# Altium PCB WatchDogAlarm_rev1_3.PcbDoc
Units mm, origin at the board's own origin, x right, y up, seen from the top; angles counter-clockwise.
Board outline 60 x 69.9 mm, 2 copper layers (Top Layer, Bottom Layer), stack 1.571 mm thick; 90 components, 62 nets, 311 pads, 95 vias.
Unrouted connection lines stored in the file: 24.
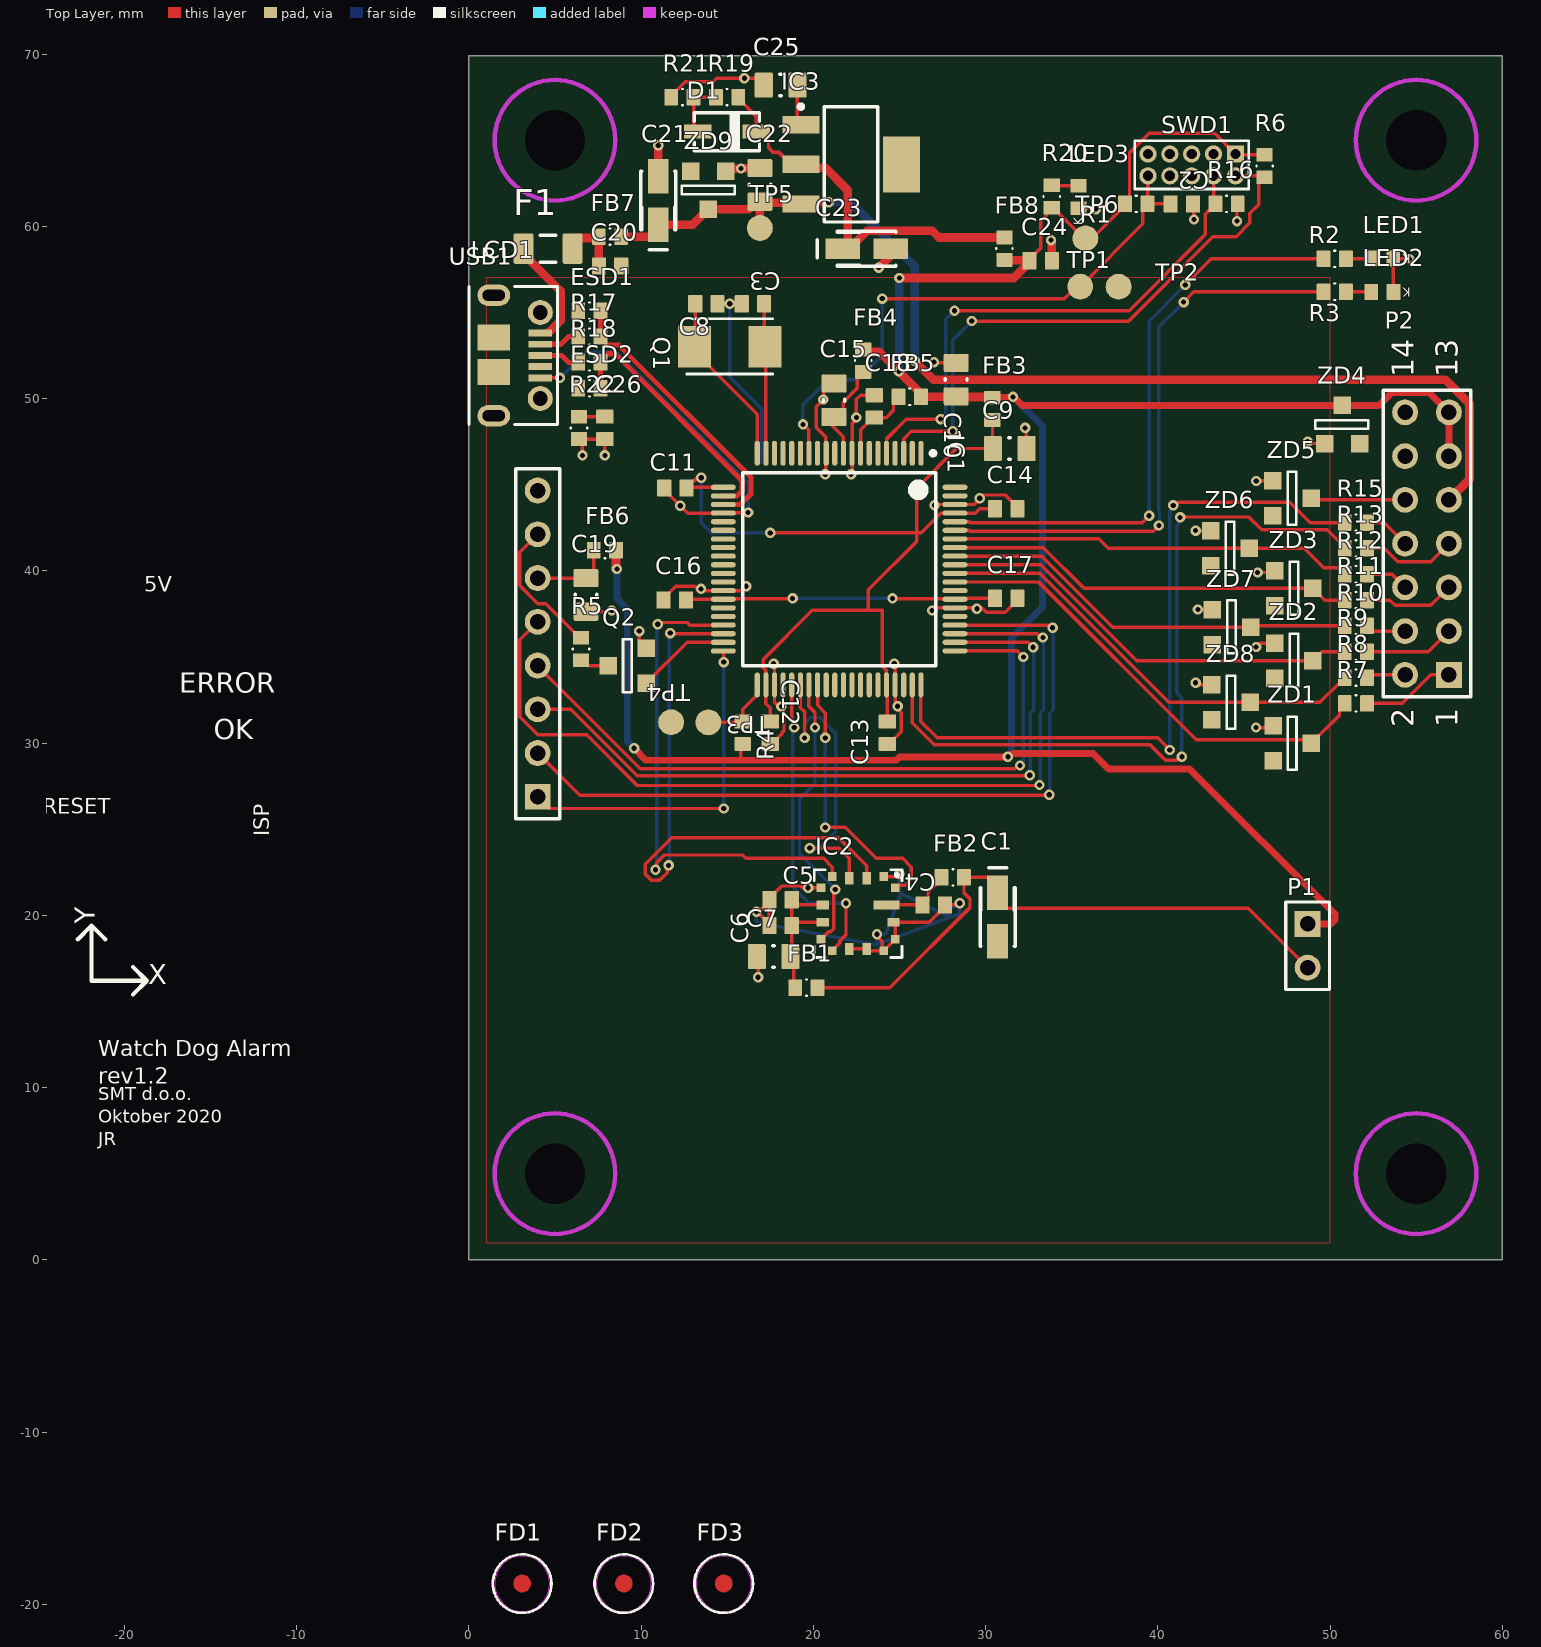
[diagram p0: Top Layer view]
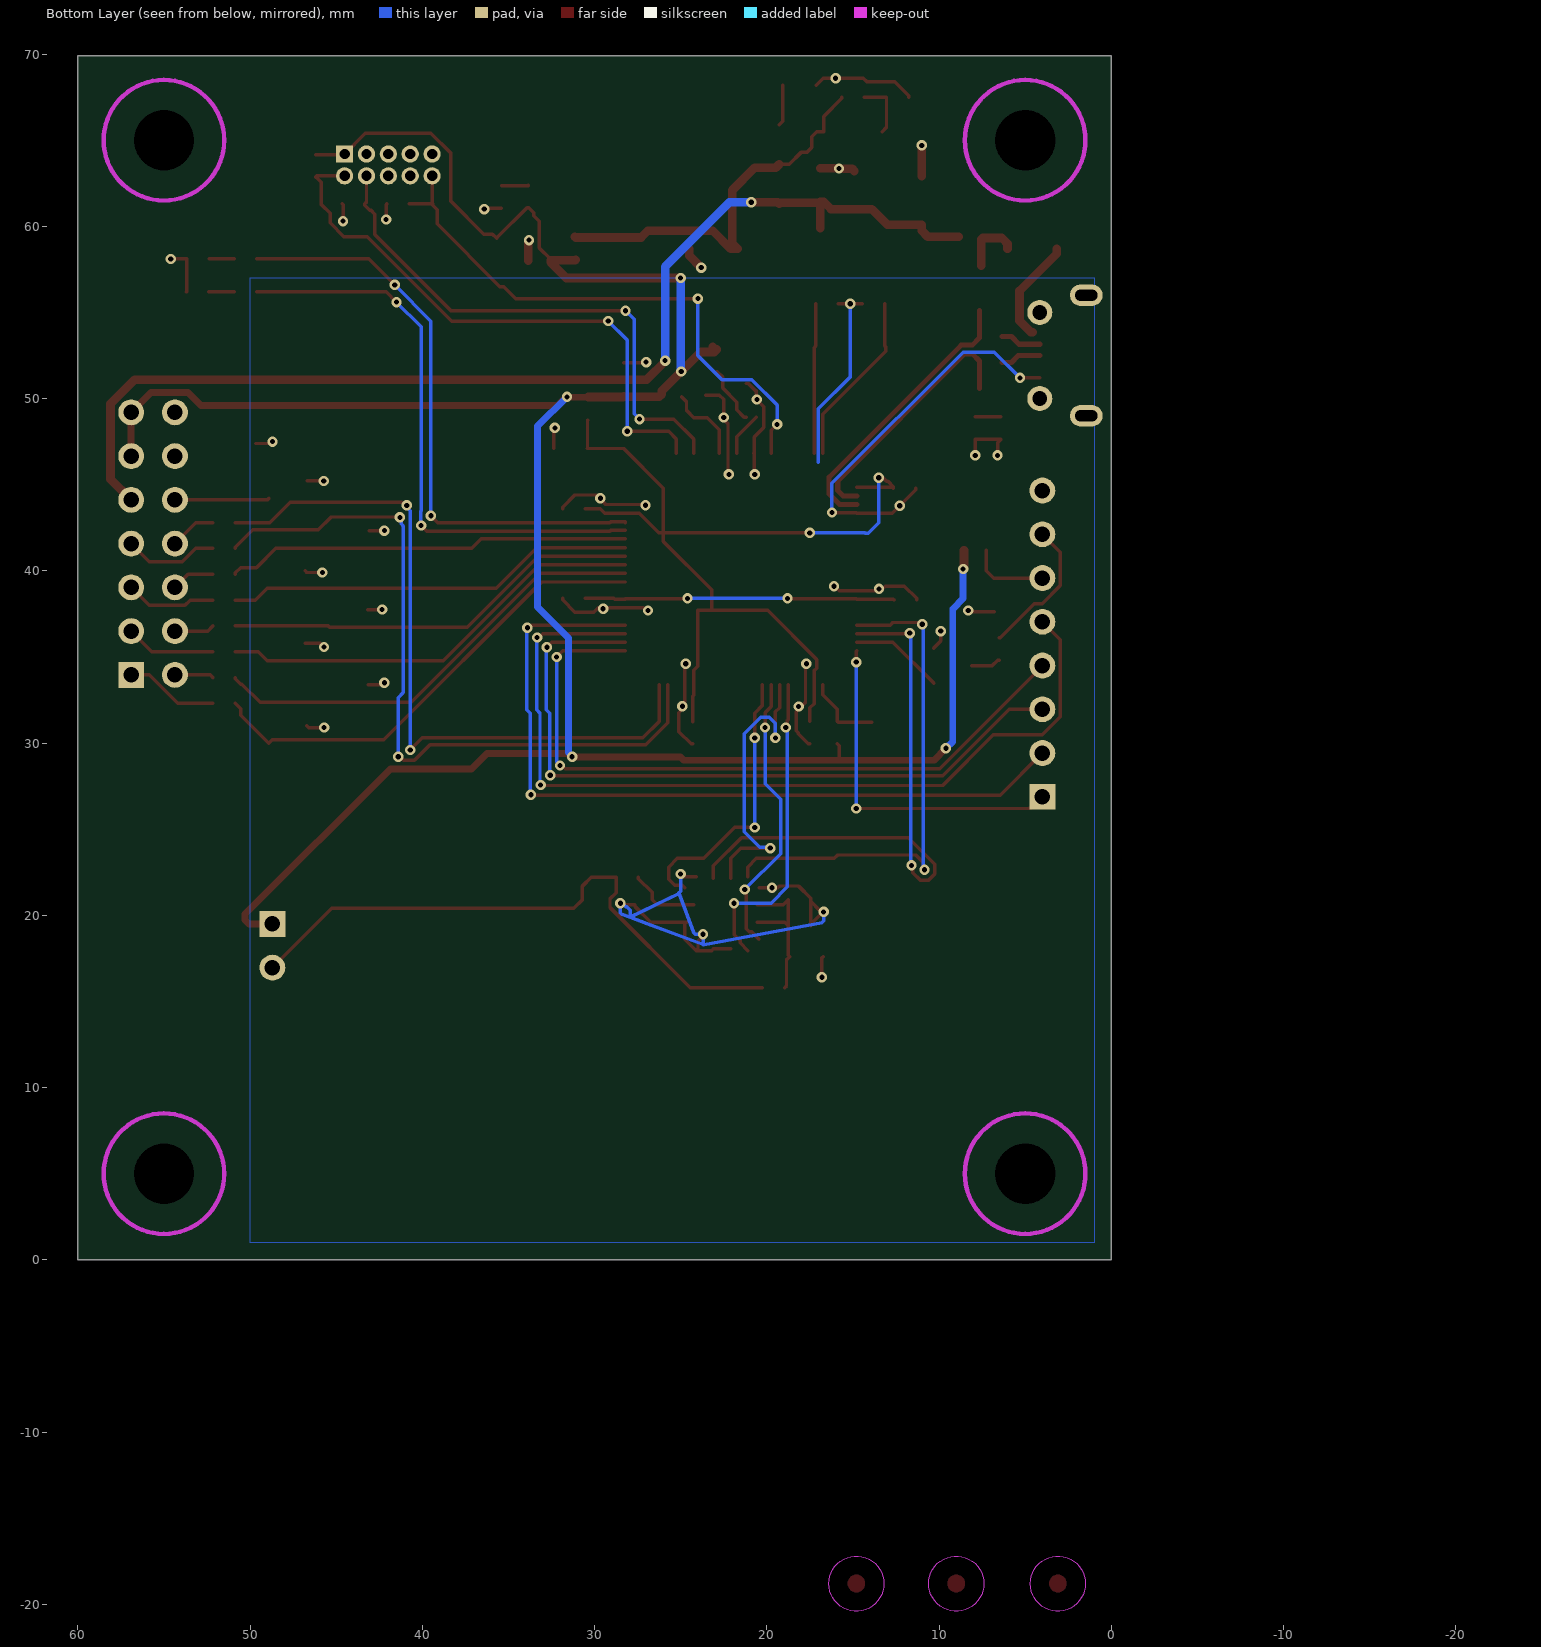
[diagram p1: Bottom Layer view, seen from below]
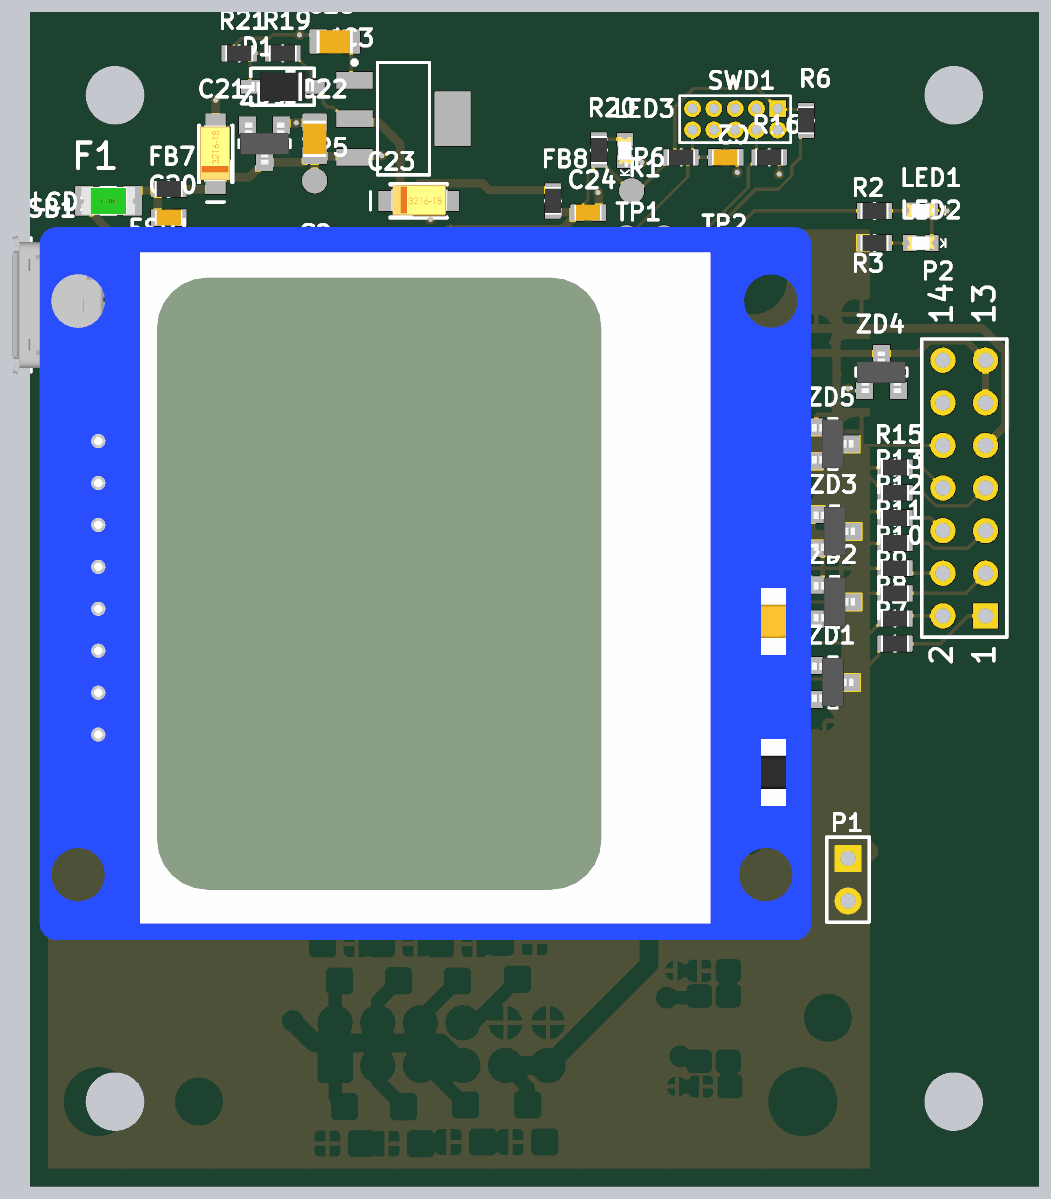
[diagram p2: 3D render of the assembled board from above, using the file's embedded part models]

## Layer stack, top to bottom
Top Solder: solder mask 0.0102, Solder Resist, Dk 3.5
Top Layer: signal copper 0.0356
Dielectric 1: dielectric 1.5, FR-4, Dk 4.8
Bottom Layer: signal copper 0.0356
Bottom Solder: solder mask 0.0102, Solder Resist, Dk 3.5

## Board outline
0,0 0,69.9 60,69.9 60,0

## Design rules (kind name [scope] priority, off if disabled: settings)
Clearance Clearance_USB [(InDifferentialPairClass('All Differential Pairs')) vs (not InDifferentialPairClass('All Differential Pairs'))] p1 off: gap=0.5 ignorepadtopadclearanceinfootprint=TRUE
Clearance Plolygon_Clearance [InPolygon] p2: gap=0.3 ignorepadtopadclearanceinfootprint=TRUE
Clearance [All] p3: gap=0.2 ignorepadtopadclearanceinfootprint=TRUE
DiffPairsRouting [All] p1: maxlimit=0.5 minlimit=0.2 mostfreqgap=0.2 toplayer_minwidth=0.3 toplayer_maxwidth=0.381 toplayer_prefwidth=0.3 bottomlayer_minwidth=0.3 bottomlayer_maxwidth=0.381 bottomlayer_prefwidth=0.3 maxuncoupledlength=12.7
HoleSize [All] p1: absolutevalues=TRUE maxlimit=5 minlimit=0.3 maxpercent=80.000 minpercent=20.000
MatchedLengths MatchedLengths_USB [All] p1: tolerance=1 checknetsindiffpair=TRUE checkdiffpairvsdiffpair=FALSE checkxsignals=FALSE checkothers=FALSE
MinimumSolderMaskSliver [All] p1: minsoldermaskwidth=0.2
PolygonConnect [All] p1: connectstyle=Relief reliefconductorwidth=0.254 reliefentries=4 polygonreliefangle="90 Angle" airgapwidth=0.254
RoutingVias [All] p1: holewidth=0.3 width=0.6 viastyle="Through Hole" minholewidth=0.3 minwidth=0.6 maxholewidth=0.8 maxwidth=1.3
SilkToSilkClearance [All] p1 off: silktosilkclearance=0.254
SolderMaskExpansion [All] p1: expansion=0.05 istentingtop=FALSE
Width [All] p1: maxlimit=5 minlimit=0.2 preferedwidth=0.2
26 further rules are at their usual default settings.

## Classes and differential pairs
component class Power: C20 C21 C22 C23 C24 C25 C26 D1 ESD1 ESD2 F1 FB7 FB8 IC3 LED3 R17 R18 R19 R20 R21 R22 TP5 TP6 USB1 ZD9
component class WatchDogAlarm_rev1_3: C1 C2 C3 C4 C5 C6 C7 C8 C9 C10 C11 C12 C13 C14 C15 C16 C17 C18 C19 FB1 FB2 FB3 FB4 FB5 FB6 FD1 FD2 FD3 IC1 IC2 LCD1 LED1 LED2 P1 P2 Q1 Q2 R1 R2 R3 R4 R5 R6 R7 R8 R9 R10 R11 R12 R13 R15 R16 SWD1 TP1 TP2 TP3 TP4 ZD1 ZD2 ZD3 ZD4 ZD5 ZD6 ZD7 ZD8
differential pair USB: +USB_P -USB_N
differential pair D: +D_P -D_N

## Components (designator, comment, footprint, x,y, rotation, side; value= is the part's Value field where it differs from the comment)
C1 "4u7" "Tantalum 3216" 30.7,19.9 r270 top
C2 "100n" SMD_C0603 41.4,61.3 r180 top
C3 "27p" SMD_C0603 16.5,55.5 r0 top
C4 "100n" SMD_C0603 27,20.6 r180 top
C5 "100n" SMD_C0603 18.1,20.9 r0 top
C6 "100n" SMD_C0603 18.1,19.4 r0 top
C7 "2u2" SMD_C0805 17.7,17.6 r0 top
C8 "27p" SMD_C0603 13.8,55.5 r180 top
C9 "2u2" SMD_C0805 31.4,47.1 r180 top
C10 "2u2" SMD_C0805 28.3,51.1 r270 top
C11 "100n" SMD_C0603 12,44.8 r0 top
C12 "100n" SMD_C0603 17.5,30.6 r90 top
C13 "100n" SMD_C0603 24.299,30.599 r90 top
C14 "100n" SMD_C0603 31.2,43.6 r180 top
C15 "2u2" SMD_C0805 21.2,49.9 r270 top
C16 "100n" SMD_C0603 11.954,38.306 r0 top
C17 "100n" SMD_C0603 31.2,38.4 r180 top
C18 "100n" SMD_C0603 23.547,49.545 r90 top
C19 "2u2" SMD_C0805 6.8,38.6 r90 top
C20 "10n" SMD_C0603 8.2,57.7 r180 top
C21 "4u7" "Tantalum 3216" 11,61.5 r90 top
C22 "2u2" SMD_C0805 16.9,62.4 r270 top
C23 "4u7" "Tantalum 3216" 23.1,58.7 r0 top
C24 "100n" SMD_C0603 33.2,58 r180 top
C25 "2u2" SMD_C0805 18.1,68.2 r0 top
C26 "10n" SMD_C0603 7.9,48.3 r90 top
D1 "BAT54T1G" SOD-123 15,65.5 r0 top
ESD1 "6V8" SMD_R0603 7,55.1 r0 top
ESD2 "6V8" SMD_R0603 7,50.6 r0 top
F1 "250mA" "PPTCF 1206" 4.6,58.7 r0 top
FB1 "600R@100MHz" SMD_R0603 19.6,15.8 r180 top
FB2 "600R@100MHz" SMD_R0603 28.1,22.2 r180 top
FB3 "600R@100MHz" SMD_R0603 30.4,49.4 r90 top
FB4 "600R@100MHz" SMD_R0603 22.9,52.2 r90 top
FB5 "600R@100MHz" SMD_R0603 25.6,50.1 r180 top
FB6 "600R@100MHz" SMD_R0603 7.9,41.2 r180 top
FB7 "600R@100MHz" SMD_R0603 8.2,59.4 r0 top
FB8 "600R@100MHz" SMD_R0603 31.1,58.7 r270 top
FD1 "Fiducial 1mm" FID1 3.1,-18.8 r0 top
FD2 "Fiducial 1mm" FID1 9,-18.8 r0 top
FD3 "Fiducial 1mm" FID1 14.8,-18.8 r0 top
IC1 "LPC1756FBD80,551" LQFP80 21.5,40.1 r270 top locked
IC2 "IIS2ICLXTR" LGA-16L 22.6,20.1 r180 top
IC3 "LM317AEMP/NOPB" SOT-223 22.2,63.6 r0 top
LCD1 "NOKIA_LCD" NOKIA_LCD 4,35.77 r90 top locked
LED1 "green" SMD_LD0603 53.025,58.128 r180 top
LED2 "red" SMD_LD0603 53.042,56.187 r180 top
LED3 "green" SMD_LD0603 35.4,61.7 r90 top
P1 "Header 2" HDR1X2 48.7,19.5 r270 top
P2 "Header 7X2" HDR2X7 56.9,33.96 r90 top
Q1 "12MHz" QABM3 17.2,53 r180 top
Q2 "2N7002" SOT-23 10.31,33.484 r90 top
R1 "10k" SMD_R0603 38.75,61.3 r180 top
R2 "240R" SMD_R0603 50.275,58.109 r180 top
R3 "240R" SMD_R0603 50.275,56.2 r180 top
R4 "10k" SMD_R0603 15.9,30.6 r270 top
R5 "240R" SMD_R0603 6.514,35.462 r270 top
R6 "10k" SMD_R0603 46.2,63.5 r90 top
R7 "33R" SMD_R0603 51.5,32.3 r180 top
R8 "33R" SMD_R0603 51.5,33.8 r0 top
R9 "33R" SMD_R0603 51.5,35.3 r180 top
R10 "33R" SMD_R0603 51.5,36.8 r0 top
R11 "33R" SMD_R0603 51.5,38.3 r180 top
R12 "33R" SMD_R0603 51.5,39.8 r0 top
R13 "33R" SMD_R0603 51.5,41.3 r180 top
R15 "33R" SMD_R0603 51.5,42.8 r0 top
R16 "10k" SMD_R0603 44,61.3 r180 top
R17 "33R" SMD_R0603 7,53.6 r180 top
R18 "33R" SMD_R0603 7,52.1 r180 top
R19 "240R" SMD_R0603 15,67.5 r0 top
R20 "1k" SMD_R0603 33.845,61.731 r270 top
R21 "402R" SMD_R0603 12.4,67.5 r0 top
R22 "33R" SMD_R0603 6.4,48.3 r90 top
SWD1 "Header 5x2" 2X5_SWD_CON 41.97,63.565 r180 top
TP1 "TEST_PAD_1.5mm" TEST_PAD_1.5MM 35.5,56.5 r90 top
TP2 "TEST_PAD_1.5mm" TEST_PAD_1.5MM 37.724,56.495 r90 top
TP3 "TEST_PAD_1.5mm" TEST_PAD_1.5MM 13.908,31.2 r270 top
TP4 "TEST_PAD_1.5mm" TEST_PAD_1.5MM 11.75,31.209 r270 top
TP5 "TEST_PAD_1.5mm" TEST_PAD_1.5mm 16.9,59.9 r180 top
TP6 "TEST_PAD_1.5mm" TEST_PAD_1.5mm 35.8,59.3 r90 top
USB1 "105017-0001.." USB_MICRO_B 2.8,52.5 r270 top
ZD1 "6V8" SOT-23 46.7,31 r270 top
ZD2 "6V8" SOT-23 46.8,35.8 r270 top
ZD3 "6V8" SOT-23 46.8,40 r270 top
ZD4 "6V8" SOT-23 49.684,47.39 r0 top
ZD5 "6V8" SOT-23 46.69,45.216 r270 top
ZD6 "6V8" SOT-23 43.09,42.316 r270 top
ZD7 "6V8" SOT-23 43.177,37.748 r270 top
ZD8 "6V8" SOT-23 43.146,33.377 r270 top
ZD9 "6V8" SOT-23 14.916,63.21 r180 top

## Footprints (in the part's own frame and the unit in brackets; to place one, negate y for a bottom-side part, rotate by r counter-clockwise, add the part's x,y. Pads: shape width x height; smd on the part's side, far side on the other; paste and mask are expansions set on the pad)
2X5_SWD_CON [mm]
  rect 1x1 hole 0.6: 1(-2.54,-0.635)
  round 1 hole 0.6: 2(-2.54,0.635) 3(-1.27,-0.635) 4(-1.27,0.635) 5(0,-0.635) 6(0,0.635) 7(1.27,-0.635) 8(1.27,0.635) 9(2.54,-0.635) 10(2.54,0.635)
  silkscreen extent -3.3,-1.4 3.3,1.4
FID1 [mm]
  Top Layer region: 0,-0.5 -0.099,-0.5 -0.283,-0.424 -0.424,-0.283 -0.5,-0.099 -0.5,0 -0.5,0.099 -0.424,0.283 -0.283,0.424 -0.099,0.5 0,0.5 0.099,0.5 0.283,0.424 0.424,0.283 0.5,0.099 0.5,0 0.5,-0.099 0.424,-0.283 0.283,-0.424 0.099,-0.5 0,-0.5
  Keep-Out Layer circle w0.01: c0,0 r1.6
  silkscreen extent -1.7,-1.7 1.7,1.7
HDR1X2 [mm] "Connector; Header; 2 Position"
  rect 1.5x1.5 hole 0.9: 1(0,0)
  round 1.5 hole 0.9: 2(2.54,0)
  silkscreen extent -1.27,-1.27 3.81,1.27
HDR2X7 [mm] "Connector; Header; 7x2 Position"
  rect 1.5x1.5 hole 0.9: 1(0,0)
  round 1.5 hole 0.9: 2(0,2.54) 3(2.54,0) 4(2.54,2.54) 5(5.08,0) 6(5.08,2.54) 7(7.62,0) 8(7.62,2.54) 9(10.16,0) 10(10.16,2.54) 11(12.7,0) 12(12.7,2.54) 13(15.24,0) 14(15.24,2.54)
  silkscreen extent -1.27,-1.27 16.51,3.81
LGA-16L [mm]
  rect 1.5x0.5 smd mask+0.05: 1(-1.65,-0.5)
  rect 0.5x0.5 smd mask+0.05: 2(-2.15,-1.5) 3(-1.5,-2.15) 6(1.5,-2.15) 7(2.15,-1.5) 10(2.15,1.5) 11(1.5,2.15) 14(-1.5,2.15) 15(-2.15,1.5)
  rect 0.5x0.7 smd mask+0.05: 4(-0.5,-2.05) 5(0.5,-2.05) 12(0.5,2.05) 13(-0.5,2.05)
  rect 0.7x0.5 smd mask+0.05: 8(2.05,-0.5) 9(2.05,0.5) 16(-2.05,0.5)
  silkscreen extent -2.55,-2.55 2.55,2.55, body extent -2.5,-2.5 2.5,2.5, height 1.7
LQFP80 [mm] "TSQFP, 80-Leads, Body 12,00x12,00mm, Pitch 0,50mm, IPC Medium Density"
  oval 1.45x0.3 smd: 1(-6.725,4.75) 2(-6.725,4.25) 3(-6.725,3.75) 4(-6.725,3.25) 5(-6.725,2.75) 6(-6.725,2.25) 7(-6.725,1.75) 8(-6.725,1.25) 9(-6.725,0.75) 10(-6.725,0.25) 11(-6.725,-0.25) 12(-6.725,-0.75) 13(-6.725,-1.25) 14(-6.725,-1.75) 15(-6.725,-2.25) 16(-6.725,-2.75) 17(-6.725,-3.25) 18(-6.725,-3.75) 19(-6.725,-4.25) 20(-6.725,-4.75) 41(6.725,-4.75) 42(6.725,-4.25) 43(6.725,-3.75) 44(6.725,-3.25) 45(6.725,-2.75) 46(6.725,-2.25) 47(6.725,-1.75) 48(6.725,-1.25) 49(6.725,-0.75) 50(6.725,-0.25) 51(6.725,0.25) 52(6.725,0.75) 53(6.725,1.25) 54(6.725,1.75) 55(6.725,2.25) 56(6.725,2.75) 57(6.725,3.25) 58(6.725,3.75) 59(6.725,4.25) 60(6.725,4.75)
  oval 0.3x1.45 smd: 21(-4.75,-6.725) 22(-4.25,-6.725) 23(-3.75,-6.725) 24(-3.25,-6.725) 25(-2.75,-6.725) 26(-2.25,-6.725) 27(-1.75,-6.725) 28(-1.25,-6.725) 29(-0.75,-6.725) 30(-0.25,-6.725) 31(0.25,-6.725) 32(0.75,-6.725) 33(1.25,-6.725) 34(1.75,-6.725) 35(2.25,-6.725) 36(2.75,-6.725) 37(3.25,-6.725) 38(3.75,-6.725) 39(4.25,-6.725) 40(4.75,-6.725) 61(4.75,6.725) 62(4.25,6.725) 63(3.75,6.725) 64(3.25,6.725) 65(2.75,6.725) 66(2.25,6.725) 67(1.75,6.725) 68(1.25,6.725) 69(0.75,6.725) 70(0.25,6.725) 71(-0.25,6.725) 72(-0.75,6.725) 73(-1.25,6.725) 74(-1.75,6.725) 75(-2.25,6.725) 76(-2.75,6.725) 77(-3.25,6.725) 78(-3.75,6.725) 79(-4.25,6.725) 80(-4.75,6.725)
  silkscreen extent -6.85,-5.6 5.6,5.6, body extent -6.9,-6.9 6.9,6.9, height 1.6
NOKIA_LCD [mm] "Connector; Header; 8 Position"
  rect 1.5x1.5 hole 0.9: 1(-8.89,0)
  round 1.5 hole 0.9: 2(-6.35,0) 3(-3.81,0) 4(-1.27,0) 5(1.27,0) 6(3.81,0) 7(6.35,0) 8(8.89,0)
  silkscreen extent -10.16,-1.27 10.16,1.27, body extent -21.14,-42.5 21.36,3.5, height 9.5
"PPTCF 1206" [mm] "PPTC fuse 2-Leads, Body 3.15x1.60mm, IPC Medium Density"
  rrect15% 1.15x1.75 smd: 1(-1.425,0) 2(1.425,0)
  silkscreen extent -0.45,-0.77 0.45,0.77, body extent -1.6,-0.82 1.6,0.83, height 0.59
QABM3 [mm]
  rect 1.9x2.4 smd: 1(0,0) 2(4.1,0)
  silkscreen extent -0.44,-1.63 4.56,1.57
SMD_C0603 [mm]
  rrect10% 0.82x1 smd: 1(-0.65,0) 2(0.65,0)
  body extent -0.82,-0.48 0.82,0.48, height 0.95
SMD_C0805 [mm] "Chip Capacitor, 2-Leads, Body 2.05x1.25mm, IPC Medium Density"
  rrect15% 1.05x1.45 smd: 1(-0.975,0) 2(0.975,0)
  silkscreen extent -0.05,-0.63 0.05,0.63, body extent -1.1,-0.7 1.1,0.7, height 1.4
SMD_LD0603 [mm]
  rrect10% 0.8x0.95 smd: 1(-0.65,0) 2(0.65,0)
  body extent -0.8,-0.4 0.8,0.4, height 0.7
SMD_R0603 [mm]
  rrect10% 0.8x0.95 smd: 1(-0.65,0) 2(0.65,0)
  silkscreen extent -0.03,-0.48 0.03,0.48, body extent -0.82,-0.48 0.82,0.48, height 0.5
SOD-123 [mm] "SOD-123; 2 Leads; Body 2.7 x 1.6 mm, (LxW)"
  rect 1.6x0.8 smd: 1(1.7,0) 2(-1.7,0)
  silkscreen extent -1.91,-1.1 1.88,1.1, body extent -1.88,-0.85 1.87,0.85, height 1.2
SOT-23 [mil]
  rect 40x40 smd: 1(0,0) 2(80,0) 3(40,87)
  silkscreen extent -21,34 100,53, body extent -18,-6 97,92, height 39
SOT-223 [mm] "SOT223, 4-Leads, Body 6.5x3.5mm, Pitch 2.3mm, Lead Span 7mm, IPC Medium Density"
  rect 2.15x1 smd: 1(-2.925,2.3) 2(-2.925,0) 3(-2.925,-2.3)
  rect 2.15x3.25 smd: 4(2.925,0)
  silkscreen extent -3.05,-3.35 1.55,3.47, body extent -3.5,-3.35 3.5,3.35, height 1.8
"Tantalum 3216" [mm]
  rect 2x1.2 smd: 1(-1.4,0) 2(1.4,0)
  silkscreen extent -2.87,-1.02 1.7,1.02, body extent -1.66,-0.86 1.74,0.94, height 1.8
TEST_PAD_1.5MM [mm]
  round 1.5 smd: 1(0,0)
TEST_PAD_1.5mm [mm]
  round 1.5 smd: 1(0,0)
USB_MICRO_B [mm] "part num: 105017-0001.."
  rect 1.5x1.9 smd: 0(-1.05,-1.35) 0(0.95,-1.35)
  rect 0.4x1.35 smd: 1(-1.3,1.35) 2(-0.65,1.35) 3(0,1.35) 4(0.65,1.35) 5(1.3,1.35)
  oval 1.25x1.9 hole 0.65 slot 1.3 at 90 deg: 6(-3.5,-1.35) 7(3.5,-1.35)
  round 1.45 hole 0.85: 8(2.5,1.35) 9(-2.5,1.35)
  silkscreen extent -4,-2.8 4,2.35, body extent -4.1,-3.9 4.1,1.5, height 2.78

## Part data
C1 C21 C23: library part "Capacitor - polarized", "Generic polarized capacitor"
C2 C3 C4 C5 C6 C7 C8 C9 C10 C11 C12 C13 C14 C15 C16 C17 C18 C19 C20 C22 C24 C25 C26: library part CAP, "Capacitor", properties=capacitor
D1: library part DIODE_SCHOTTKY, Manufacturer="ON SEMICONDUCTOR", farnellCode=1651157, partnumber=BAT54T1G, properties="Small Signal Schottky Diode, Single, 30 V, 200 mA, 350 mV, 600 mA, 150 °C"
ESD1 ESD2: library part ZenerDiode, "ESD Protection device", Manufacturer="ON Semiconductor", partnumber=BZX84C6V8LT1G, farnellCode=1651587, properties="Zener Single Diode, 6.8 V, 225 mW, SOT-23, 6 %, 3 Pins, 150 °C"
F1: library part PolyFuse, "Resettable Fuse, PPTC, 1206 (3216 Metric), POLYFUSE 1206L Series, 16 VDC, 250 mA, 500 mA, 0.08 s", Manufacturer=Littelfuse, Manufacturer Number=2920L030DR, Max voltage=16V, Resistance=2.3Ω, Trip current=500mA, Category=Fuses, Dealer=Farnell, Dealer number=1596990, HelpURL=https://www.farnell.com/datasheets/683946.pdf, Holing current=250mA, Price=0.46, Technology=SMT, Type="Poly fuse"
FB1 FB2 FB3 FB4 FB5 FB6 FB7 FB8: library part FB, "Ferrite bead"
FD1 FD2 FD3: library part FIDUCIAL, Category=Fiducials
IC1: library part LPC1756FBD80, "LPC1756FBD80", Manufacturer=NXP, partnumber=LPC1756FBD80,551, properties="Scalable Mainstream 32-bit Microcontroller (MCU) based on ARM Cortex-M3 Core"
IC2: Manufacturer=STM, partnumber=IIS2ICLXTR, properties="Inclinometers High-accuracy, high-resolution, low-power, 2-axis digital inclinometer with embedded Machine Learning Core"
IC3: library part LM317KC, "3-Terminal Adjustable Regulator", Manufacturer="TEXAS INSTRUMENTS", farnellCode=3122676, partnumber=LM317AEMP/NOPB, properties="Linear Voltage Regulator, Adjustable Positive, 40V primary input, 1.2V to 37V/1A/1 Output, SOT-223-4"
LED1 LED2 LED3: library part LED
P1: "Header, 2-Pin", LatestRevisionDate=17-Jul-2002, LatestRevisionNote="Re-released for DXP Platform.", Publisher="Altium Limited"
P2: "Header, 7-Pin, Dual row", LatestRevisionDate=17-Jul-2002, LatestRevisionNote="Re-released for DXP Platform.", Publisher="Altium Limited"
Q1: library part Crystal, "Crystal", Manufacturer=ABRACON, partnumber=ABM3-12.000MHZ-D2Y-T, properties="Crystal, 12 MHz, SMD, 5mm x 3.2mm, 30 ppm, 18 pF, 20 ppm, ABM3 Series"
Q2: library part N-MOSFET, "Power MOSFET, N Channel, 60 V, 300 mA, 2.8 ohm, SOT-23, Surface Mount", Case=SOT23-3, Manufacturer=NXP, Max current=0.3A, Max power disipation=830mW, Max voltage=60V, Category=MOSFETs, Dealer=Farnell, Dealer number=1510761, HelpURL=https://www.farnell.com/datasheets/1499179.pdf, Logic level=Yes, Manufacturer Number=2N7002, Price=0.039, RDS=2.8Ω, SKU=5000000000001, Technology=SMT, Type="N-enhancment mode"
R1 R2 R3 R4 R5 R6 R7 R8 R9 R10 R11 R12 R13 R15 R16 R17 R18 R19 R20 R21 R22: library part RESISTOR, properties=resistor
SWD1: library part "Header 5X2", "Header, 5-Pin, Dual row", Manufacturer=HARWIN, partnumber=M50-3500542, farnellCode=1022305, properties="Board-To-Board Connector, 1.27 mm, 10 Contacts, Header, Archer M50 Series, Through Hole, 2 Rows"
TP1 TP2 TP3 TP4 TP5 TP6: library part TEST_PAD
USB1: library part Micro_USB_MIUSB-F5M-BB-U, Manufacturer=MOLEX, farnellCode=2293836, partnumber=105017-0001.., properties="USB Connector, Micro USB Type B, USB 2.0, Receptacle, 5 Ways, Surface Mount, Right Angle"
ZD1 ZD2 ZD3 ZD4 ZD5 ZD6 ZD7 ZD8 ZD9: library part ZenerDiode, "Zener Diode", Manufacturer="ON Semiconductor", partnumber=BZX84C6V8LT1G, farnellCode=1651587, properties="Zener Single Diode, 6.8 V, 225 mW, SOT-23, 6 %, 3 Pins, 150 °C"

## Free pads (board coordinates)
  rect 0x0 hole 3.5 unplated mask+0.05: 0(5,5) 0(5,65) 0(55,5) 0(55,65)

## Via types
v1: diameter 0.6, hole 0.3, Top Layer to Bottom Layer, tented both sides, 95 vias

## Nets (pads, with @x,y where several pads share a name; then routed paths per layer and width w, separated by ;. In a path a pad name is that pad's centre, name@x,y a point inside that pad or via, vN(x,y) a via of type N, cw(c..) or ccw(c..) an arc to the next point about the centre after c; other vN are vias at no path point)
3V3: C10.2 C24.2 FB3.2 FB4.2 FB5.1 FB6.1 FB8.2 P1.1 P2.11 P2.13 R1.2 R4.2 R6.2 R20.2 SWD1.1 TP6.1 ZD4.3 | length 157.8
  Top Layer w0.2: 15.8,29 15.8,29.85 R4.2 ; C24.2 32.55,58.09 33.2,58.74 33.2,60.3 33.525,60.625 33.525,60.781 33.825,61.081 33.92,61.081 35.675,59.326 35.675,59.3 35.924,59.549 36.424,59.549 38.36,61.485 38.36,64.261 39.499,65.4 43.31,65.4 SWD1.1 44.56,64.15 R6.2
  Top Layer w0.4: v1(9.6,29.7) 10.3,29 15.8,29 24.802,29 25.002,29.2 31.354,29.2 31.554,29.4 36.252,29.4 37.152,28.5 41.85,28.5 50.284,20.066 50.284,19.734 50.05,19.5 P1.1 ; FB3.2@30.363,50.087 30.375,50.075 31.575,50.075 v1(31.6,50.1) 31.654,50.1 32.154,49.6 ZD4.3 52.855,49.6 53.605,50.35 55.75,50.35 P2.13 P2.11
  Top Layer w0.5: FB6.1 8.55,40.177 8.6,40.127 v1(8.6,40.1) ; FB4.2@23.125,53 22.975,52.85 FB4.2 23.05,52.7 23.838,52.7 v1(24.969,51.569) 26.1,50.438 26.1,50.25 FB5.1 26.263,50.112 28.287,50.112 C10.2 28.337,50.087 FB3.2@30.363,50.087 ; v1(25,57) 31.64,57 32.55,57.91 C24.2 32.525,58.025 31.125,58.025 FB8.2
  Bottom Layer w0.4: v1(8.6,40.1) 8.6,38.39 9.2,37.79 9.2,30.1 v1(9.6,29.7) ; v1(31.3,29.2) 31.3,29.254 31.5,29.454 31.5,36.1 33.3,37.9 33.3,48.4 v1(31.6,50.1)
  Bottom Layer w0.5: v1(24.969,51.569) 24.984,51.584 24.984,56.984 v1(25,57)
3V3_ACCEL: C1.1 FB1.1 FB2.1 P1.2 | length 35.3
  Top Layer w0.2: FB1.1 24.449,15.8 29.1,20.451 29.1,20.963 28.75,21.313 FB2.1 30.2,22.2 30.7,21.7 30.7,20.9 31.2,20.4 45.26,20.4 P1.2
5V_USB: C21.1 C22.2 FB7.2 IC3.3 P2.9 TP5.1 ZD9.3 | length 66
  Top Layer w0.5: FB7.2 10.65,59.4 11,59.75 C21.1 13,60.1 ZD9.3 16.275,61 16.7,61.425 C22.2 ; TP5.1 C22.2 ; v1(20.9,61.4) 19.375,61.4 IC3.3 19.212,61.362 16.962,61.362 C22.2 ; v1@25.881,52.181 26.962,51.1 56.697,51.1 58.1,49.697 58.1,45.32 P2.9
  Bottom Layer w0.5: v1(20.9,61.4) 22.161,61.4 25.9,57.661 v1(25.9,52.2)
AOUT: IC1.6 P2.10 ZD5.3 | length 5.5
  Top Layer w0.2: ZD5.3 48.98,44.12 P2.10
D_N: R17.2 USB1.2 | length 2.4
  Top Layer w0.3: USB1.2 5.35,53.15 5.8,53.6 R17.2
D_P: R18.2 USB1.3 | length 2.4
  Top Layer w0.3: USB1.3 5.4,52.5 5.8,52.1 R18.2
GND: C1.2 C2.1 C3.1 C4.1 C5.1 C6.1 C7.1 C8.1 C9.1 C10.1 C11.1 C12.1 C13.1 C14.1 C15.1 C16.1 C17.1 C18.2 C19.1 C20.1 C21.2 C22.1 C23.2 C24.1 C25.1 C26.1 IC1.9 IC1.12 IC1.24 IC1.33 IC1.43 IC1.57 IC1.66 IC1.78 IC2.3 IC2.7 IC2.12 IC2.13 IC2.14 IC2.15 IC2.16 LCD1.8 LED1.1 LED2.1 LED3.1 P2.12 P2.14 Q2.2 R16.1 R21.1 R22.1 SWD1.3 SWD1.5 SWD1.9 TP2.1 TP4.1 USB1.5 ZD1.1 ZD2.1 ZD3.1 ZD4.1 ZD5.1 ZD6.1 ZD7.1 ZD8.1 ZD9.1 | length 150
  Top Layer w0.2: USB1.5 v1(5.3,51.2) ; v1(6.6,46.7) 6.6,47.45 R22.1 C26.1 v1(7.9,46.7) ; C19.1 8.225,37.625 v1(8.3,37.7) ; v1(9.9,36.5) 9.902,36.498 9.902,35.924 Q2.2 ; C16.1 11.304,38.396 12.014,39.106 13.115,39.106 13.371,38.85 v1@13.69,38.85 ; C11.1 11.35,44.71 v1(12.28,43.78) 12.71,43.35 IC1.24 14.792,43.367 16.2,43.367 v1(16.216,43.383) ; R21.1 11.75,67.575 12.567,68.392 14.183,68.392 14.391,68.6 16.725,68.6 C25.1 ; v1(13.482,38.95) 13.59,38.95 v1@13.69,38.85 ; C8.1 v1(15.15,55.5) C3.1 ; v1(16.1,39.1) 16.048,39.1 15.798,38.85 v1@13.69,38.85 ; C7.1 16.8,17.525 v1(16.8,16.4) ; C6.1 C6.1@17.45,19.49 ; C12.1 17.59,29.95 18.183,30.543 18.183,30.597 18.3,30.714 18.3,31.807 v1@18.025,32.082 ; v1(17.7,34.6) 17.75,34.55 IC1.43 17.75,32.357 v1@18.025,32.082 ; v1(18.149,32.125) 18.106,32.082 v1@18.025,32.082 ; v1@19.8,21.6 v1(19.7,21.6) ; IC2.7 v1(19.7,21.6) ; v1(20.7,45.6) 20.731,45.631 20.731,46.806 IC1.12 20.731,46.844 20.731,47.766 20.175,48.322 20.175,49.528 20.573,49.927 v1(20.573,49.95) 20.614,49.99 20.614,50.45 20.654,50.45 21.079,50.875 C15.1 ; IC2.12 IC2.13 23.2,17.95 IC2.14 ; v1(22.2,45.6) 22.25,45.65 22.25,48.542 22.5,48.792 22.5,49.949 22.747,50.195 C18.2 ; v1(23.7,18.9) 23.7,18.792 23.992,18.5 23.992,18.058 IC2.14 ; IC2.3 24.85,22.25 v1(25,22.4) ; C13.1 24.389,29.949 25.099,30.659 25.099,31.759 v1@24.75,32.108 ; v1(24.7,34.6) 24.7,34.5 24.75,34.45 IC1.57 v1@24.75,32.108 ; v1(24.899,32.14) 24.867,32.108 v1@24.75,32.108 ; v1(26.9,37.7) 27.008,37.7 27.158,37.85 v1@29.55,37.85 ; v1(27.006,52.117) 27.048,52.075 C10.1 ; v1(27.037,43.81) 27.077,43.85 IC1.78 29.343,43.85 v1@29.663,44.17 ; v1(28.5,20.7) 28.4,20.6 C4.1 27.65,20.51 26.74,19.6 IC2.16 24.75,19.5 IC2.15 IC2.14 ; v1(29.5,37.8) v1@29.55,37.85 ; v1(29.663,44.214) v1@29.663,44.17 ; C17.1 31.85,38.31 31.14,37.6 30.04,37.6 29.79,37.85 v1@29.55,37.85 ; C14.1 31.85,43.69 31.14,44.4 29.893,44.4 v1@29.663,44.17 ; v1(32.3,48.3) 32.375,48.225 C9.1 ; LED3.1 36.35,61.05 v1(36.4,61) ; C2.1 42.1,61.25 v1(42.1,60.4) ; v1(42.2,33.5) 42.323,33.377 ZD8.1 ; v1(42.199,42.333) 42.216,42.316 ZD6.1 ; v1(42.331,37.749) 42.333,37.748 ZD7.1 ; v1(44.6,60.3) 44.6,61.25 R16.1 ; v1(45.7,30.9) 46.6,30.9 ZD1.1 ; v1@45.7,45.2 v1(45.716,45.216) ZD5.1 ; v1(45.71,35.575) 45.935,35.8 ZD2.1 ; v1(45.8,39.9) 46.7,39.9 ZD3.1 ; v1(48.7,47.5) 48.81,47.39 ZD4.1 ; LED2.1 53.683,56.196 53.683,58.12 LED1.1 54.572,58.128 v1(54.6,58.1) ; v1(16.7,20.2) 16.777,20.277 16.917,20.277 C5.1@17.45,20.81 ; v1(16.7,20.2) 16.74,20.2 v1@16.79,20.15 ; v1(16.7,20.2) 16.75,20.15 v1@16.79,20.15 ; v1@16.79,20.15 C6.1@17.45,19.49 ; C6.1@17.45,19.49 C5.1@17.45,20.81 ; C5.1@17.45,20.81 C5.1 17.45,20.99 18.16,21.7 19.26,21.7 19.36,21.6 v1(19.7,21.6)
  Top Layer w0.5: C21.2 v1(11,64.7) ; ZD9.1 15.043,63.337 15.787,63.337 15.816,63.366 16.891,63.366 C22.1 ; v1(23.8,57.6) 24.5,58.3 C23.2 ; v1(33.8,59.2) 33.85,59.15 C24.1
  Bottom Layer w0.2: v1(5.3,51.2) 6.8,52.7 8.6,52.7 16.216,45.084 v1(16.216,43.383) ; v1(15.15,55.5) 15.15,51.25 17,49.4 17,46.3 ; v1(16.7,20.2) 16.7,19.674 16.759,19.616 16.802,19.572 23.651,18.3 ; v1(25,22.4) 25,21.396 25.086,21.31 ; 25.09,21.269 27.934,19.888 ; 25.1,21.296 25.081,21.245 24.243,18.989 24.154,18.9 v1(23.7,18.9) 23.7,18.3 26.93,19.511 27.928,19.885 27.934,19.888 ; 28.441,20.097 28.411,20.067 27.934,19.888 ; 28.441,20.097 28.5,20.156 28.5,20.239 v1(28.5,20.7) 28.392,20.7 28.192,20.5 28.134,20.5 27.934,20.299 27.934,19.888
  other v1: 22.5,48.9 15.806,63.356 16,68.6
INT1: IC1.37 IC2.6 | length 29.9
  Top Layer w0.2: v1(10.841,22.647) 10.918,22.724 10.918,23.066 11.351,23.5 15.876,23.5 16.076,23.3 20.6,23.3 21.1,22.8 IC2.6 ; v1(10.975,36.9) 11.084,36.9 11.184,37 12.687,37 12.837,36.85 IC1.37
  Bottom Layer w0.2: v1(10.841,22.647) 10.908,22.714 10.908,36.833 v1(10.975,36.9)
INT2: IC1.38 IC2.4 | length 34.1
  Top Layer w0.2: v1(11.6,22.9) 11.523,22.823 11.523,22.481 11.09,22.047 10.593,22.047 10.241,22.398 10.241,22.955 11.786,24.5 21.466,24.5 23.1,22.866 IC2.4 ; v1(11.7,36.38) 11.73,36.35 IC1.38
  Bottom Layer w0.2: v1(11.6,22.9) 11.65,22.95 11.65,36.33 v1(11.7,36.38)
ISP_ENABLE: IC1.41 R4.1 TP3.1 | length 4.5
  Top Layer w0.2: TP3.1 15.85,31.2 R4.1 15.9,31.95 16.75,32.8 IC1.41
LCD_D/C\: IC1.62 LCD1.3 | length 42.4
  Top Layer w0.2: LCD1.3 5.926,31.96 9.786,28.1 32.531,28.1 v1(32.566,28.134) ; IC1.62 32.481,35.85 v1(32.766,35.566)
  Bottom Layer w0.2: v1(32.566,28.134) 32.6,28.169 32.6,31.729 32.8,31.929 32.8,35.531 v1(32.766,35.566)
LCD_LED: IC1.39 Q2.1 | length 5.4
  Top Layer w0.2: Q2.1 12.676,35.85 IC1.39
LCD_MOSI: IC1.61 LCD1.4 | length 41.1
  Top Layer w0.2: LCD1.4 4,34.451 9.951,28.5 31.692,28.5 31.892,28.7 v1(32,28.7) ; IC1.61 31.85,35.35 v1(32.2,35)
  Bottom Layer w0.2: v1(32,28.7) 32.2,28.9 v1(32.2,35)
LCD_RST: IC1.40 LCD1.1 | length 20.2
  Top Layer w0.2: LCD1.1 4.65,26.23 4.737,26.23 4.767,26.2 v1(14.8,26.2) ; IC1.40 14.8,35.325 v1(14.8,34.7)
  Bottom Layer w0.2: v1(14.8,26.2) v1(14.8,34.7)
LCD_SCK: IC1.63 LCD1.5 | length 51.7
  Top Layer w0.2: LCD1.5 2.95,35.99 2.95,31.525 4.005,30.47 6.85,30.47 9.786,27.534 33.097,27.534 v1(33.131,27.569) ; IC1.63 33.004,36.35 33.223,36.131 v1(33.331,36.131)
  Bottom Layer w0.2: v1(33.131,27.569) 33.166,27.603 33.166,31.729 33.366,31.929 33.366,36.097 v1(33.331,36.131)
LCD_SSEL: IC1.64 LCD1.2 | length 46.3
  Top Layer w0.2: LCD1.2 6.451,26.969 33.663,26.969 v1(33.697,27.003) ; IC1.64 33.636,36.85 33.789,36.697 v1(33.897,36.697)
  Bottom Layer w0.2: v1(33.697,27.003) 33.731,27.037 33.731,31.729 33.931,31.929 33.931,36.663 v1(33.897,36.697)
MISO: IC1.46 IC2.5 | length 17.7
  Top Layer w0.2: IC1.46 19.25,32.058 19.5,31.808 v1(19.5,30.3) ; v1(19.8,23.9) 21.5,23.9 22.1,23.3 IC2.5
  Bottom Layer w0.2: v1(19.5,30.3) 19.5,31.149 19.851,31.5 20.349,31.5 21.3,30.549 21.3,24.851 20.4,23.951 19.851,23.951 v1(19.8,23.9)
MOSI: IC1.45 IC2.11 | length 18.4
  Top Layer w0.2: IC1.45 18.75,31.358 18.823,31.285 18.823,30.977 v1(18.9,30.9) ; IC2.11 21.55,18.4 21.55,18.524 21.9,18.874 v1(21.9,20.7)
  Bottom Layer w0.2: v1(18.9,30.9) 18.9,30.792 18.8,30.692 18.8,21.651 19.751,20.7 v1(21.9,20.7)
NetC3_2: C3.2 IC1.19 Q1.1 | length 8.7
  Top Layer w0.2: C3.2 17.15,53.05 Q1.1 17.25,52.95 IC1.19
NetC4_2: C4.2 FB2.2 IC2.1 | length 4.2
  Top Layer w0.2: IC2.1 C4.2 26.66,20.91 26.66,21.335 27.45,22.125 FB2.2
NetC5_2: C5.2 C6.2 C7.2 FB1.2 IC2.8 IC2.9 | length 9.1
  Top Layer w0.2: FB1.2 18.856,15.894 18.856,17.419 C7.2 18.75,17.675 C6.2 ; IC2.9 18.95,19.6 C6.2 ; IC2.8 19.05,20.6 C5.2 C6.2
NetC8_2: C8.2 IC1.20 Q1.2 | length 10.2
  Top Layer w0.2: C8.2 13.15,53.05 Q1.2 13.1,52.75 16.75,49.1 IC1.20
NetC9_2: C9.2 C11.2 C12.2 C13.2 C14.2 FB3.1 IC1.21 IC1.42 IC1.56 IC1.77 | length 57.5
  Top Layer w0.2: v1(13.5,45.4) 13.25,45.4 13.05,45.2 12.96,45.2 12.65,44.89 C11.2 12.7,44.85 IC1.21 ; C12.2 17.5,32.041 17.25,32.291 IC1.42 17.231,33.394 17.231,34.221 17.1,34.351 17.1,34.849 19.951,37.7 23.2,37.7 ; v1(17.5,42.2) 26,42.2 ; C13.2 24.299,32.724 24.25,32.773 IC1.56 24.231,33.394 24.231,34.221 24,34.451 24,37.7 23.2,37.7 ; FB3.1 30.407,48.743 30.407,47.118 C9.2 28.3,47.1 26,44.8 26,42.2 ; C14.2 29.659,43.6 29.409,43.35 IC1.77 28.206,43.331 27.406,43.331 26.275,42.2 26,42.2 ; 23.2,37.7 23.2,38.9 26,41.7 26,42.2
  Bottom Layer w0.2: v1(13.5,45.4) 13.5,42.8 14.117,42.183 14.283,42.183 14.3,42.2 v1(17.5,42.2)
NetC15_2: C15.2 FB4.1 IC1.10 | length 6
  Top Layer w0.2: C15.2@20.6,48.925 21.731,47.794 21.731,46.844 IC1.10 ; C15.2 21.321,48.925 21.746,49.35 21.746,49.793 22.565,50.612 22.565,51.25 22.865,51.55 FB4.1
NetC16_2: C16.2 C17.2 IC1.34 IC1.67 | length 18
  Top Layer w0.2: C16.2 12.649,38.35 IC1.34 14.794,38.369 18.769,38.369 v1(18.8,38.4) ; v1(24.6,38.4) 24.631,38.369 28.206,38.369 IC1.67 28.827,38.35 28.877,38.4 C17.2
  Bottom Layer w0.2: v1(18.8,38.4) v1(24.6,38.4)
NetC19_2: C19.2 FB6.2 LCD1.6 | length 4.6
  Top Layer w0.2: LCD1.6 6.795,39.58 C19.2 6.825,39.575 7.25,40 FB6.2
NetC20_2: C20.2 F1.2 FB7.1 | length 3.5
  Top Layer w0.5: F1.2 6.025,58.994 6.35,59.319 7.469,59.319 7.55,59.239 C20.2
NetC23_1: C23.1 D1.1 FB8.1 IC3.2 R19.2 | length 23.1
  Top Layer w0.2: R19.2 15.65,67.425 16.7,66.375 D1.1 17.1,65.5 17.4,65.2 17.4,64.575 17.687,64.288 18.012,64.288 18.7,63.6 IC3.2
  Top Layer w0.5: IC3.2 19.48,63.395 20.705,63.395 22,62.1 22,59 C23.1 22.1,58.7 23.15,59.75 26.894,59.75 27.294,59.35 FB8.1 FB8.1@31.15,59.4
NetC25_2: C25.2 D1.2 IC3.1 R19.1 R21.2 | length 5.8
  Top Layer w0.2: D1.2 13.05,65.75 R21.2 R19.1 ; C25.2 19.075,66.1 IC3.1
NetF1_1: F1.1 USB1.1 | length 6.1
  Top Layer w0.5: F1.1 3.175,58.4 5.325,56.25 5.325,54.513 4.662,53.85 USB1.1@4.575,53.85
NetIC1_75: IC1.75 R3.2 | length 34
  Top Layer w0.2: IC1.75 29.05,42.35 29.1,42.3 39.731,42.3 v1(40.066,42.634) ; v1(41.5,55.6) 42.1,56.2 R3.2
  Bottom Layer w0.2: v1(40.066,42.634) 40.1,42.669 40.1,43.449 40.066,43.483 40.066,54.166 v1(41.5,55.6)
NetIC1_76: IC1.76 R2.2 | length 34.4
  Top Layer w0.2: IC1.76@28.225,42.8 IC1.76 29.05,42.85 29.1,42.8 39.1,42.8 v1(39.5,43.2) ; v1(41.6,56.6) 43.109,58.109 R2.2
  Bottom Layer w0.2: v1(39.5,43.2) 39.5,54.5 v1(41.6,56.6)
NetLCD1_7: LCD1.7 R5.1 | length 8.2
  Top Layer w0.2: LCD1.7 2.95,41.07 2.95,39.145 4.005,38.09 4.461,38.09 6.439,36.112 R5.1
NetLED1_2: LED1.2 R2.1 | length 1.5
  Top Layer w0.2: R2.1 50.935,58.119 52.365,58.119 LED1.2
NetLED2_2: LED2.2 R3.1 | length 1.5
  Top Layer w0.2: R3.1 50.932,56.194 52.386,56.194 LED2.2
NetLED3_2: LED3.2 R20.1 | length 1.6
  Top Layer w0.2: R20.1 33.86,62.365 35.385,62.365 LED3.2
NetP2_1: P2.1 R7.1 | length 5.4
  Top Layer w0.2: R7.1 54.185,32.3 55.845,33.96 P2.1
NetP2_2: P2.2 R8.2 | length 2.3
  Top Layer w0.2: R8.2 52.31,33.96 P2.2
NetP2_3: P2.3 R9.1 | length 5.2
  Top Layer w0.2: R9.1 55.7,35.3 P2.3
NetP2_4: P2.4 R10.2 | length 2.3
  Top Layer w0.2: R10.2 52.45,36.5 P2.4
NetP2_5: P2.5 R11.1 | length 5.3
  Top Layer w0.2: R11.1 53.467,38.3 53.777,37.99 55.85,37.99 P2.5
NetP2_6: P2.6 R12.2 | length 2.5
  Top Layer w0.2: R12.2 53.6,39.8 P2.6
NetP2_7: P2.7 R13.1 | length 5.5
  Top Layer w0.2: R13.1 53.155,41.3 53.925,40.53 55.85,40.53 P2.7
NetP2_8: P2.8 R15.2 | length 2.7
  Top Layer w0.2: R15.2 53.14,42.8 P2.8
NetQ2_3: Q2.3 R5.2 | length 1.7
  Top Layer w0.2: R5.2 6.589,34.812 6.901,34.5 Q2.3
PIO0: IC1.69 R7.2 ZD1.3 | length 27.7
  Top Layer w0.2: IC1.69 33.077,39.35 42.235,30.192 48.702,30.192 ZD1.3 50.55,31.624 50.55,32 R7.2
PIO1: IC1.70 R8.1 ZD8.3 | length 26.4
  Top Layer w0.2: IC1.70 33.143,39.85 40.632,32.361 ZD8.3 49.411,32.361 50.475,33.425 50.55,33.425 50.85,33.725 R8.1
PIO2: IC1.71 R9.2 ZD2.3 | length 25.1
  Top Layer w0.2: IC1.71 33.208,40.35 38.774,34.784 ZD2.3 49.526,35.3 R9.2
PIO3: IC1.72 R10.1 ZD7.3 | length 24.4
  Top Layer w0.2: IC1.72 33.274,40.85 37.392,36.732 ZD7.3 45.455,36.8 R10.1
PIO4: IC1.73 R11.2 ZD3.3 | length 23.9
  Top Layer w0.2: IC1.73 33.35,41.35 35.716,38.984 ZD3.3 49.694,38.3 R11.2
PIO5: IC1.74 R12.1 ZD6.3 | length 23.5
  Top Layer w0.2: IC1.74 36.585,41.85 37.135,41.3 ZD6.3 48.5,41.3 49.625,40.175 50.55,40.175 50.85,39.875 R12.1
RESET: C2.2 IC1.14 R1.1 SWD1.10 TP1.1 | length 33.2
  Top Layer w0.2: v1(19.4,48.5) 19.75,48.15 IC1.14 ; v1(24,55.8) 34.562,55.8 35.262,56.5 TP1.1 39.14,60.14 39.14,60.965 39.475,61.3 C2.2 ; R1.1 39.43,61.33 SWD1.10
  Bottom Layer w0.2: v1(19.4,48.5) 19.4,49.625 20.875,51.1 22.6,51.1 24,52.5 v1(24,55.8)
RX: IC1.59 R13.2 | length 43.3
  Top Layer w0.2: IC1.59 25.75,31.184 27.034,29.9 39.551,29.9 40.451,29 41.092,29 41.292,29.2 v1(41.4,29.2) ; v1(41.3,43.1) 41.324,43.124 45.293,43.124 46.041,42.376 49.849,42.376 50.85,41.375 R13.2
  Bottom Layer w0.2: v1(41.3,43.1) 41.223,43.023 41.223,42.723 41.1,42.6 41.1,32.934 41.4,32.634 v1(41.4,29.2)
SCK: IC1.47 IC2.10 | length 16.6
  Top Layer w0.2: IC1.47 19.75,32.124 20.1,31.774 v1(20.1,30.9) ; IC2.10 20.883,19.033 21.007,19.033 21.2,19.226 21.2,21.4 21.275,21.475 v1(21.275,21.5)
  Bottom Layer w0.2: v1(20.1,30.9) 20.1,27.633 19.2,26.733 19.2,23.575 v1(21.275,21.5)
SHLD: C26.2 ESD1.1 ESD2.1 R22.2 USB1.6 USB1.7 USB1.8 USB1.9 | length 1.5
  Top Layer w0.2: R22.2 C26.2
SSEL: IC1.48 IC2.2 | length 16.3
  Top Layer w0.2: IC1.48 20.25,32.19 20.7,31.74 v1(20.7,30.3) ; v1(20.7,25.1) 21.849,25.1 23.649,23.3 25.2,23.3 25.7,22.8 25.7,22.1 25.35,21.75 24.9,21.75 IC2.2
  Bottom Layer w0.2: v1(20.7,25.1) v1(20.7,30.3)
SWCLK: IC1.5 R16.2 SWD1.4 | length 31.2
  Top Layer w0.2: IC1.5 24.25,47.65 25.407,48.807 v1(27.393,48.807) ; v1(28.2,55.1) 38.334,55.1 42.76,59.526 42.76,60.71 42.975,60.925 43.05,60.925 43.35,61.225 R16.2 43.24,61.41 SWD1.4
  Bottom Layer w0.2: v1(27.393,48.807) 27.393,48.817 27.7,49.124 27.7,54.6 v1(28.2,55.1)
SWDIO: IC1.3 R6.1 SWD1.2 | length 34
  Top Layer w0.2: IC1.3 25.25,47.65 25.7,48.1 v1(28.1,48.1) ; v1(29.2,54.5) 38.3,54.5 43.2,59.4 44.549,59.4 45.35,60.201 45.35,60.75 45.865,61.265 45.865,62.55 46.165,62.85 R6.1 46.12,62.93 SWD1.2
  Bottom Layer w0.2: v1(28.1,48.1) 28.1,53.4 v1(29.2,54.5)
TX: IC1.60 R15.1 | length 42.1
  Top Layer w0.2: IC1.60 26.25,31.25 27.2,30.3 40,30.3 v1(40.7,29.6) ; v1(40.9,43.8) 41.008,43.8 41.2,43.992 47.668,43.992 48.86,42.8 R15.1
  Bottom Layer w0.2: v1(40.7,29.6) 40.7,43.492 40.9,43.692 v1(40.9,43.8)
USB_N: ESD1.2 IC1.23 R17.1 | length 16.5
  Top Layer w0.3: ESD1.2 R17.1 7.65,53.525 8.075,53.1 8.707,53.1 16.378,45.429 16.378,44.464 15.764,43.85 IC1.23
USB_P: ESD2.2 IC1.22 R18.1 | length 14.8
  Top Layer w0.3: ESD2.2 R18.1 7.65,52.175 8.075,52.6 8.5,52.6 15.878,45.222 15.878,44.671 15.557,44.35 IC1.22
VDDA: C18.1 FB5.2 IC1.8 | length 4.6
  Top Layer w0.2: IC1.8 22.75,48.189 23.457,48.895 24.23,48.895 24.659,49.325 24.659,49.809 FB5.2
pads on no net: IC1.1 IC1.2 IC1.4 IC1.7 IC1.11 IC1.13 IC1.15 IC1.16 IC1.17 IC1.18 IC1.25 IC1.26 IC1.27 IC1.28 IC1.29 IC1.30 IC1.31 IC1.32 IC1.35 IC1.36 IC1.44 IC1.49 IC1.50 IC1.51 IC1.52 IC1.53 IC1.54 IC1.55 IC1.58 IC1.65 IC1.68 IC1.79 IC1.80 IC3.4 SWD1.6 SWD1.7 SWD1.8 USB1.0 USB1.4 ZD1.2 ZD2.2 ZD3.2 ZD4.2 ZD5.2 ZD6.2 ZD7.2 ZD8.2 ZD9.2

## Polygon pours and split planes (outlines as drawn)
GND on Top Layer "Top Layer-GND" (solid, remove dead copper, shelved, pour order 0): 1,1 50,1 50,57 1,57
GND on Bottom Layer "Bottom Layer-GND" (solid, remove dead copper, shelved, pour order 2): 1,1 50,1 50,57 1,57

## Keep-outs
Keep-Out Layer:
  circle w0.254: c5,5 r3.5
  circle w0.254: c55,5 r3.5
  circle w0.254: c55,65 r3.5
  circle w0.254: c5,65 r3.5

## Silkscreen, mask and mechanical layers (free items; w line width, h text height)
Top Overlay:
  lines w0.25: -22.7,18.6 -21.9,19.4 ; -21.1,18.6 -21.9,19.4 ; -19.5,15.4 -18.7,16.2 ; -19.5,17 -18.7,16.2 ; -21.9,19.4 -21.9,16.2 -18.7,16.2
  text "5V" at -18.85,38.5 h1.52
  text "ERROR" at -16.8,32.5 h2
  text "OK" at -14.8,29.8 h2
  text "RESET" at -24.75,25.6 h1.52
  text "ISP" at -11.3,24.6 h1.52 r90
  text "Y" at -21.3,19.5 h2 r90
  text "X" at -18.6,15.6 h2
  text "Watch Dog Alarm / rev1.2" at -21.5,9.9 h1.6
  text "SMT d.o.o. / Oktober 2020 / JR" at -21.5,6.4 h1.3
Board outline:
  the board outline again, w0.15

## Text inside footprints (layer, text, board x,y; h text height)
LED1: Top Overlay "K" at 54.676,58.382 h0.5 r180
LED2: Top Overlay "K" at 54.693,56.441 h0.5 r180
LED3: Top Overlay "K" at 35.654,60.049 h0.5 r90
P2: Top Overlay "13" at 57.408,51.232 h1.27 r90; Top Overlay "14" at 54.868,51.232 h1.27 r90; Top Overlay "1" at 57.408,30.912 h1.27 r90; Top Overlay "2" at 54.868,30.912 h1.27 r90